# EAGLE board OLED Temp (EAGLE 6.4)
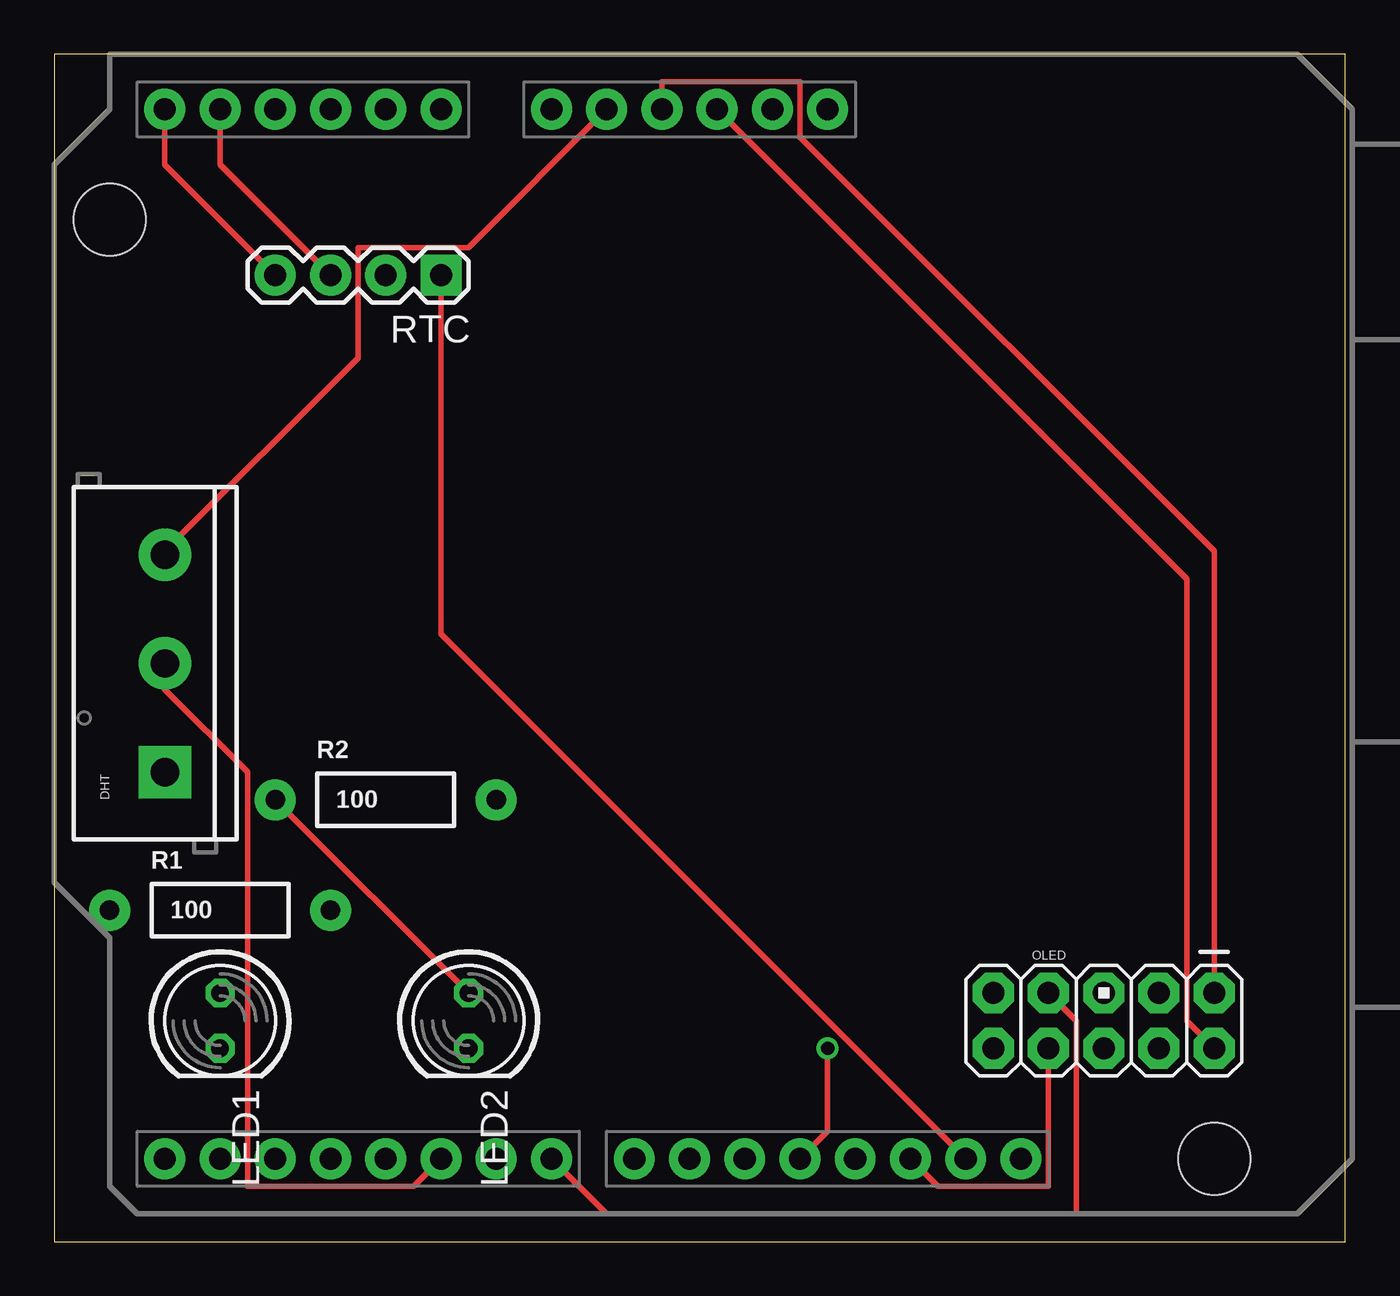
[diagram p0: board, top side]
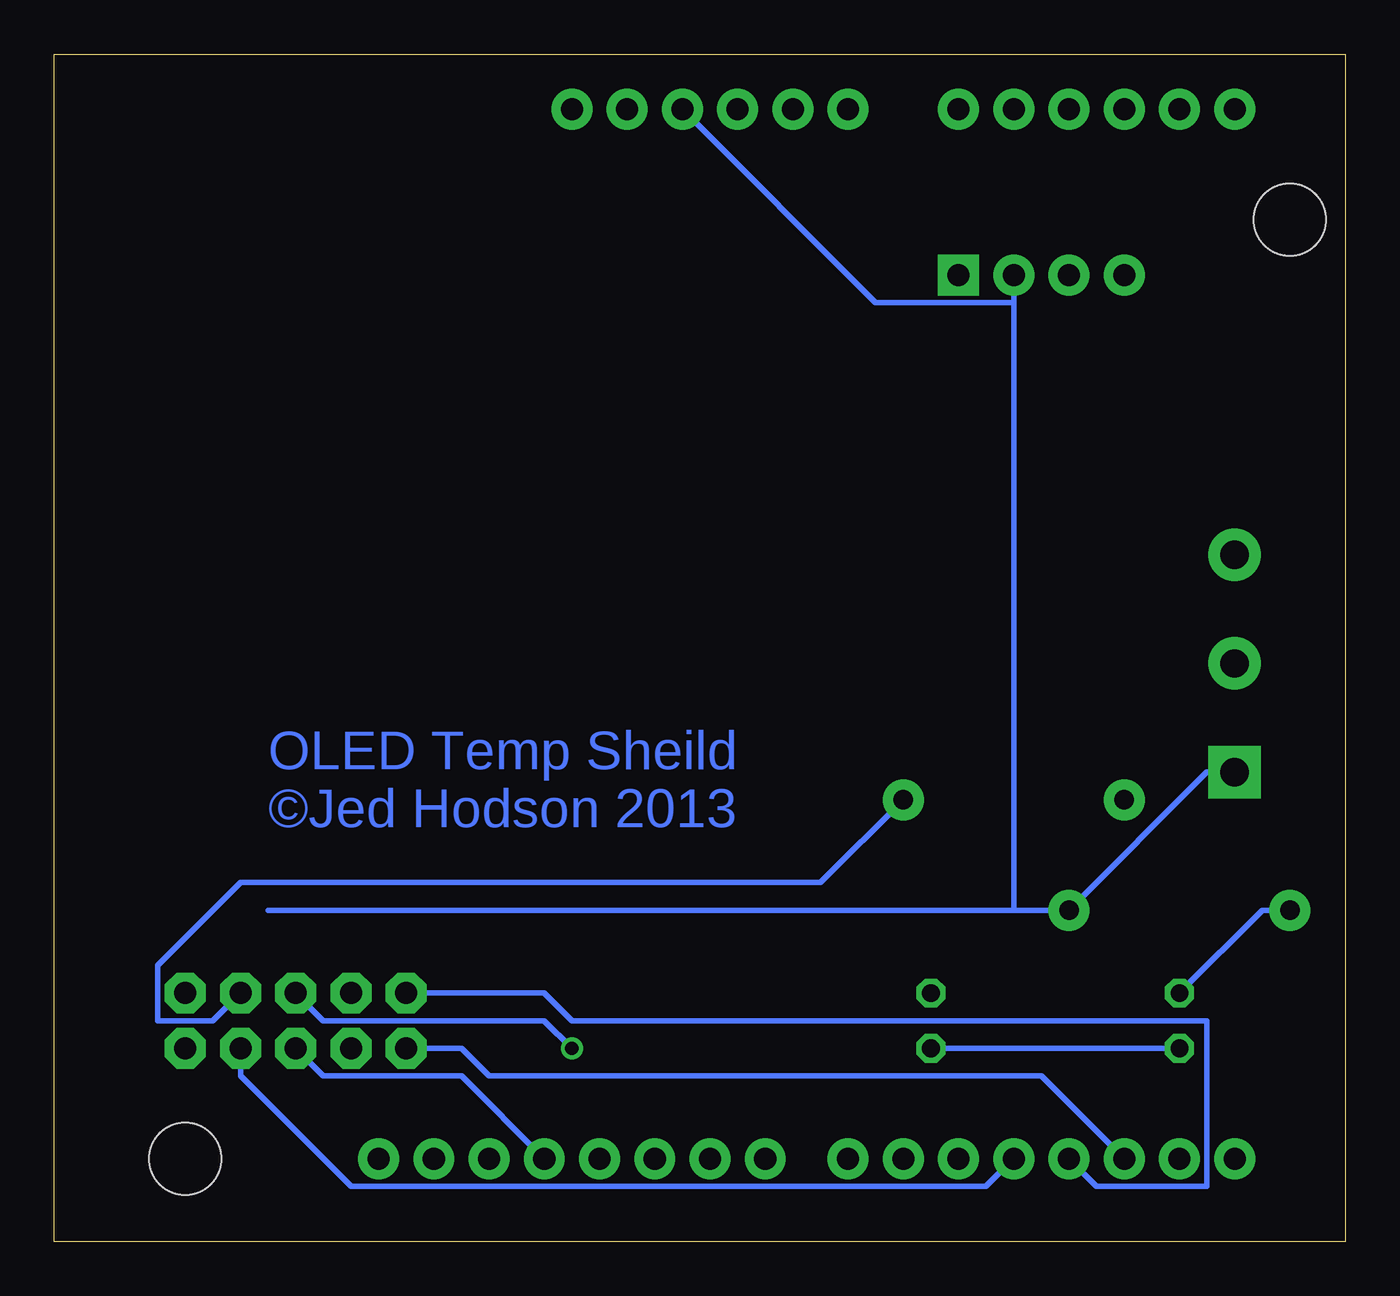
[diagram p1: board, bottom side, seen from below]

Size 59.36 x 54.6 mm. Coordinates in mm from the lower left corner, seen from the top.
Outline: 0,0 59.36,0 59.36,54.6 0,54.6 0,0
Copper layers (1*16): Top 0.035mm / dielectric 1.5mm / Bottom 0.035mm
Design rules "default": minimum track width 10mil, minimum drill 24mil, track to track 8mil, track to pad 8mil, pad to pad 8mil, via to via 8mil, smd to smd 8mil, copper to edge 40mil, drill to drill 8mil, minimum pad ring 10mil, minimum via ring 8mil, stop-mask expansion 4mil, vias tented up to drill 0mil, thermal gap 10mil

## Footprints (pad centres in the part's own frame; a part is rotated, then mirrored left to right if it is on the bottom)
SCREWTERMINAL-5MM-3 = drill 1.3 pad 2.413 square: 1 0,0 | drill 1.3 pad 2.413: 2 5,0; 3 10,0
LED5MM = drill 0.813 octagon: A -1.27,0; K 1.27,0
AVR_ICSP = drill 1.016 pad 1.88 octagon: 1 -1.27,5.08; 2 1.27,5.08; 3 -1.27,2.54; 4 1.27,2.54; 5 -1.27,0; 6 1.27,0; 7 -1.27,-2.54; 8 1.27,-2.54; 9 -1.27,-5.08; 10 1.27,-5.08
AXIAL-0.4 = drill 0.9 pad 1.88: P$1 -5.08,0; P$2 5.08,0
1X04 = drill 1.016 pad 1.88 square: 1 0,0 | drill 1.016 pad 1.88: 2 2.54,0; 3 5.08,0; 4 7.62,0
DUEMILANOVE_SHIELD_NOLABELS = drill 1.016 pad 1.88: 3.3V 50.8,26.67; 5V 50.8,29.21; A0 50.8,41.91; A1 50.8,44.45; A2 50.8,46.99; A3 50.8,49.53; A4 50.8,52.07; A5 50.8,54.61; AREF 2.54,15.24; D2 2.54,49.53; D3 2.54,46.99; D4 2.54,44.45; D5 2.54,41.91; D6 2.54,39.37; D7 2.54,36.83; D8 2.54,33.02; D9 2.54,30.48; D10 2.54,27.94; D11 2.54,25.4; D12 2.54,22.86; D13 2.54,20.32; GND@0 50.8,31.75; GND@1 50.8,34.29; GND@2 2.54,17.78; RES 50.8,24.13; RX 2.54,54.61; TX 2.54,52.07; VIN 50.8,36.83 | hole 3.302: 45.72,57.15; 2.54,6.35

## Placement (x,y rotation side)
DHT  [SCREWTERMINAL-5MM-3]  5.08,21.59 90 top
LED1  GREEN  [LED5MM]  7.62,10.16 270 top
LED2  GREEN  [LED5MM]  19.05,10.16 270 top
OLED  M05X2PTH  [AVR_ICSP]  48.26,10.16 270 top
R1  100  [AXIAL-0.4]  7.62,15.24 0 top
R2  100  [AXIAL-0.4]  15.24,20.32 0 top
RTC  [1X04]  17.78,44.45 180 top
U1  ARDUINO_SHIELDNOLABELS  [DUEMILANOVE_SHIELD_NOLABELS]  59.69,1.27 90 top

## Library data of the parts
DHT OLED RTC = SparkFun-Connectors
LED1 LED2 = led
R1 R2 = SparkFun-Passives
U1 = SparkFun-Boards

## Nets
GND: LED1.K LED2.K
N$1: DHT.1 OLED.2 R1.P$2 RTC.2 U1.5V
N$2: LED1.A R1.P$1
N$3: OLED.10 U1.D2
N$4: OLED.1 U1.GND@0
N$5: OLED.4 U1.D4
N$7: OLED.6 U1.D12
N$8: OLED.5 U1.D11
N$9: OLED.8 U1.D13
N$10: OLED.7 U1.D7
N$11: DHT.2 U1.D5
N$12: DHT.3 U1.GND@1
N$13: RTC.1 U1.GND@2
N$14: RTC.3 U1.A4
N$15: RTC.4 U1.A5
N$16: LED2.A R2.P$1
N$17: OLED.3 R2.P$2
N$18: OLED.9 U1.D3

## Tracks (layer width: path | path; a pad name or v marks a point on that pad's centre or on a via)
GND
  Bottom 0.254: LED2.K LED1.K
N$1
  Top 0.254: OLED.2 52.07,10.16 52.07,30.48 U1.5V
  Bottom 0.254: DHT.1 6.35,21.59 R1.P$2 15.24,15.24 | 15.24,15.24 49.53,15.24 | 15.24,15.24 15.24,43.18 | 15.24,43.18 RTC.2 | U1.5V 21.59,43.18 15.24,43.18
N$2
  Bottom 0.254: LED1.A 3.81,15.24 R1.P$1
N$3
  Bottom 0.254: U1.D2 13.97,7.62 39.37,7.62 40.64,8.89 OLED.10
N$4
  Top 0.254: OLED.1 53.34,31.75 34.29,50.8 34.29,53.34 27.94,53.34 U1.GND@0
N$5
  Bottom 0.254: U1.D4 16.51,2.54 45.72,2.54 50.8,7.62 OLED.4
N$7
  Bottom 0.254: U1.D12 40.64,7.62 46.99,7.62 OLED.6
N$8  (via drill 0.61)
  Top 0.254: U1.D11 35.56,5.08 v35.56,8.89
  Bottom 0.254: v35.56,8.89 36.83,10.16 46.99,10.16 OLED.5
N$9
  Top 0.254: U1.D13 40.64,2.54 45.72,2.54 OLED.8
N$10
  Top 0.254: U1.D7 25.4,1.27 46.99,1.27 46.99,10.16 OLED.7
N$11
  Top 0.254: U1.D5 16.51,2.54 8.89,2.54 8.89,21.59 5.08,25.4 DHT.2
N$12
  Top 0.254: U1.GND@1 19.05,45.72 13.97,45.72 13.97,40.64 5.08,31.75 DHT.3
N$13
  Top 0.254: U1.GND@2 17.78,27.94 RTC.1
N$14
  Top 0.254: RTC.3 7.62,49.53 U1.A4
N$15
  Top 0.254: RTC.4 5.08,49.53 U1.A5
N$16
  Top 0.254: R2.P$1 LED2.A
N$17
  Bottom 0.254: R2.P$2 24.13,16.51 50.8,16.51 54.61,12.7 54.61,10.16 52.07,10.16 OLED.3
N$18
  Bottom 0.254: U1.D3 11.43,2.54 6.35,2.54 6.35,10.16 35.56,10.16 36.83,11.43 OLED.9

## Text on the board
Bottom: OLED Temp Sheild / ©Jed Hodson 2013